# EAGLE board satellite (EAGLE 6.4)
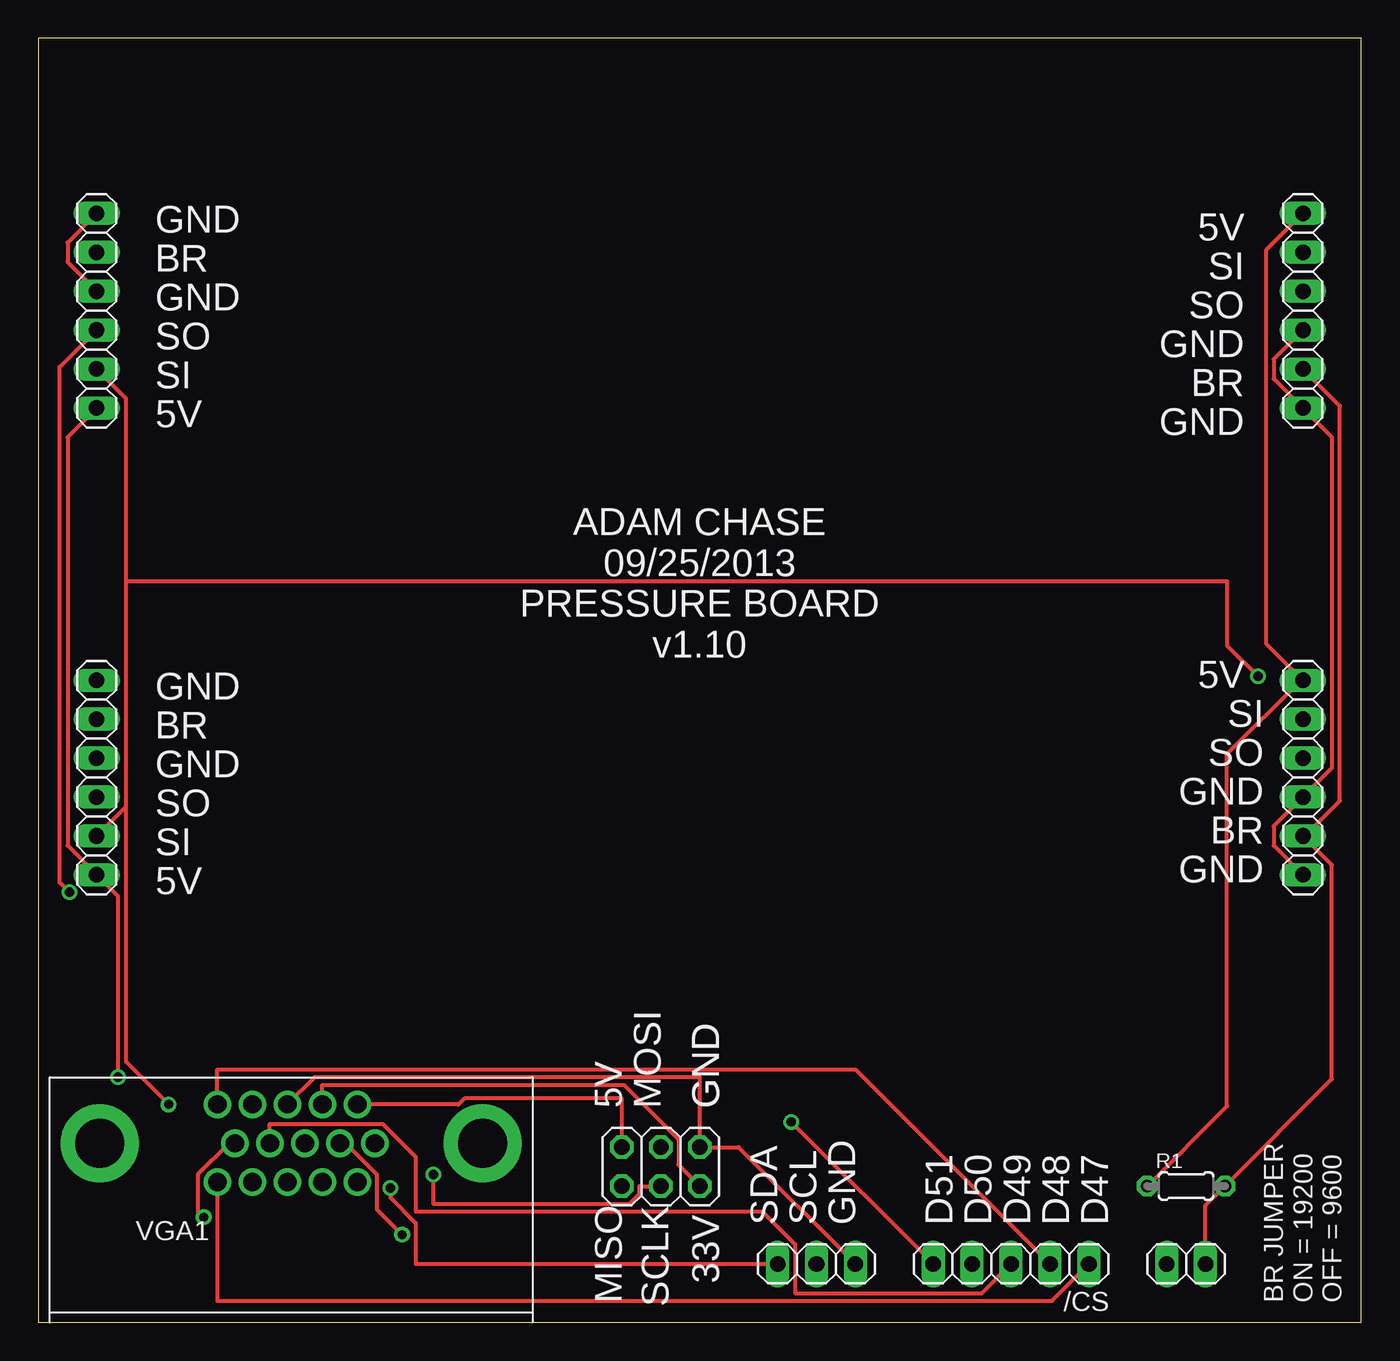
[diagram p0: board, top side]
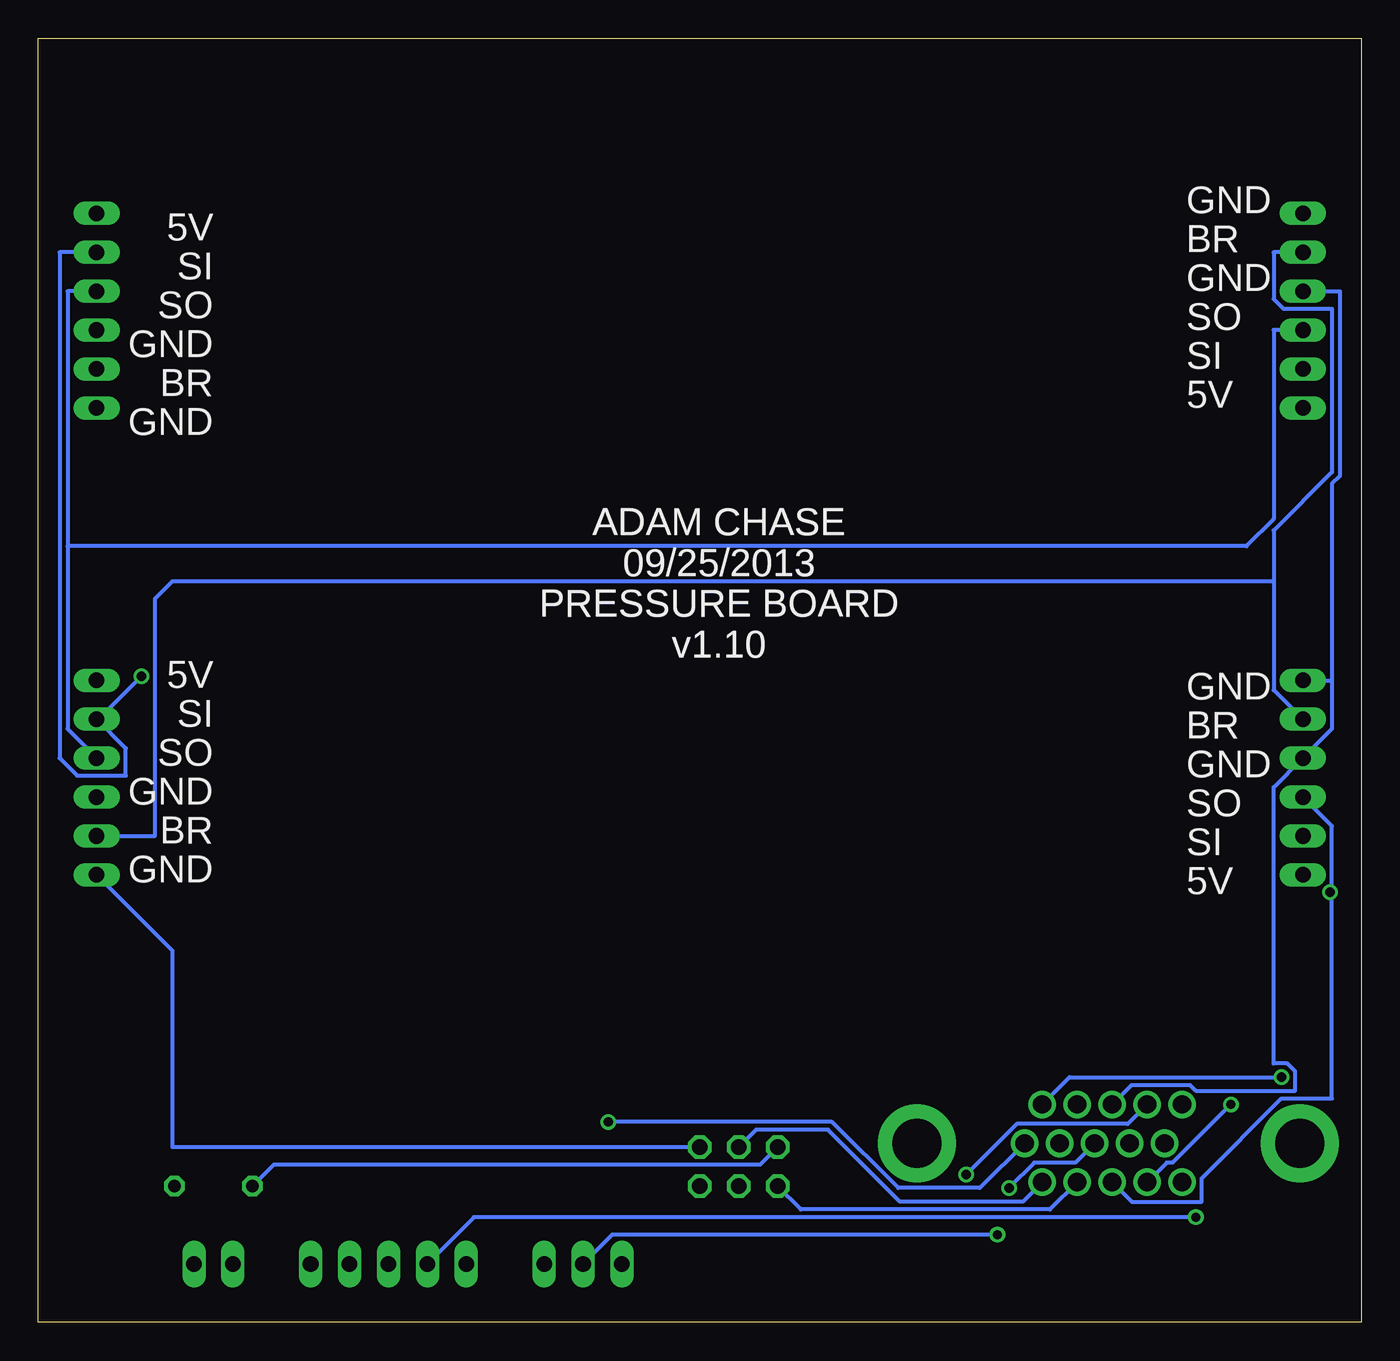
[diagram p1: board, bottom side, seen from below]

Size 86.36 x 83.82 mm. Coordinates in mm from the lower left corner, seen from the top.
Outline: 0,0 86.36,0 86.36,83.82 0,83.82 0,0
Copper layers (1*16): Top 0.035mm / dielectric 1.5mm / Bottom 0.035mm
Design rules "default": minimum track width 10mil, minimum drill 24mil, track to track 8mil, track to pad 8mil, pad to pad 8mil, via to via 8mil, smd to smd 8mil, copper to edge 40mil, drill to drill 8mil, minimum pad ring 10mil, minimum via ring 8mil, stop-mask expansion 4mil, vias tented up to drill 0mil, thermal gap 10mil
tRestrict: area 45.7,50.8 to 77.5,80; area 7.6,19.1 to 39.4,48.3; area 45.7,19.1 to 77.5,48.3; area 7.6,50.8 to 39.4,80
bRestrict: area 7.6,50.8 to 39.4,80; area 45.7,50.8 to 77.5,80; area 7.6,19.1 to 39.4,48.3; area 45.7,19.1 to 77.5,48.3

## Footprints (pad centres in the part's own frame; a part is rotated, then mirrored left to right if it is on the bottom)
1X05 = drill 1.016 long: 1 -5.08,0; 2 -2.54,0; 3 0,0; 4 2.54,0; 5 5.08,0
1X02 = drill 1.016 long: 1 -1.27,0; 2 1.27,0
1X03 = drill 1.016 long: 1 -2.54,0; 2 0,0; 3 2.54,0
1X06 = drill 1.016 long: 1 -6.35,0; 2 -3.81,0; 3 -1.27,0; 4 1.27,0; 5 3.81,0; 6 6.35,0
0204/5 = drill 0.813 octagon: 1 -2.54,0; 2 2.54,0
2X03 = drill 1.016 octagon: 1 -2.54,-1.27; 2 -2.54,1.27; 3 0,-1.27; 4 0,1.27; 5 2.54,-1.27; 6 2.54,1.27
DB-15-F90+SHIELD-SMALL_PADS = drill 1.2 pad 1.524: 1 4.318,14.224; 2 2.032,14.224; 3 -0.254,14.224; 4 -2.54,14.224; 5 -4.826,14.224; 6 5.461,11.684; 7 3.175,11.684; 8 0.889,11.684; 9 -1.397,11.684; 10 -3.683,11.684; 11 4.318,9.144; 12 2.032,9.144; 13 -0.254,9.144; 14 -2.54,9.144; 15 -4.826,9.144 | drill 3.175 pad 5.08: SHIELD@1 -12.497,11.684; SHIELD@2 12.497,11.684

## Placement (x,y rotation side)
/CS  [1X05]  63.5,3.81 180 top
BR  [1X02]  74.93,3.81 180 top
I2C  [1X03]  50.8,3.81 0 top
JP1  [1X06]  3.81,66.04 90 top
JP2  [1X06]  82.55,35.56 270 top
JP3  [1X06]  82.55,66.04 270 top
JP4  [1X06]  3.81,35.56 90 top
R1  4.7K  [0204/5]  74.93,8.89 0 top
SPI  [2X03]  40.64,10.16 0 top
VGA1  VGA-F90S  [DB-15-F90+SHIELD-SMALL_PADS]  16.51,0 0 top

## Library data of the parts
/CS BR I2C JP1-JP4 SPI = pinhead
R1 = rcl
VGA1 = VideoConnectors

## Nets
5V: JP1.1 JP2.1 JP3.1 JP4.1 R1.1 SPI.2 VGA1.1
33V: SPI.5 VGA1.2
BR: BR.1 JP1.5 JP2.5 JP3.5 JP4.5 R1.2
GND: I2C.3 JP1.4 JP1.6 JP2.4 JP2.6 JP3.4 JP3.6 JP4.4 JP4.6 SPI.6 VGA1.3
GPIO1: /CS.1 VGA1.15
GPIO2: /CS.2 VGA1.5
GPIO3: /CS.3 VGA1.9
GPIO4: /CS.4 VGA1.10
GPIO5: /CS.5 VGA1.6
MISO: SPI.1 VGA1.12
MOSI: SPI.4 VGA1.11
RX: JP1.3 JP2.3 JP3.3 JP4.3 VGA1.13
SCL: I2C.2 VGA1.7
SCLK: SPI.3 VGA1.4
SDA: I2C.1 VGA1.8
TX: JP1.2 JP2.2 JP3.2 JP4.2 VGA1.14

## Tracks (layer width: path | path; a pad name or v marks a point on that pad's centre or on a via)
5V  (via drill 0.61)
  Top 0.254: JP3.1 80.14,69.98 80.14,44.32 JP2.1 82.42,41.91 77.6,37.08 77.6,14.1 R1.1 | JP1.1 1.91,57.78 1.91,31.11 JP4.1 5.21,27.81 v5.21,16 | VGA1.1 27.43,14.22 27.81,14.61 38.1,14.61 SPI.2
  Bottom 0.254: R1.1 70.99,10.29 39.24,10.29 SPI.2 | v5.21,16 19.05,16 VGA1.1
33V
  Top 0.254: SPI.5 41.78,10.29 41.78,11.94 38.23,15.49 18.54,15.49 VGA1.2
BR
  Top 0.254: BR.1 76.2,7.62 R1.2 84.45,15.88 84.45,29.84 JP2.5 82.68,31.75 84.96,34.04 84.96,59.82 JP3.5
  Bottom 0.254: JP4.5 5.71,41.27 5.71,48.39 | 5.71,48.39 5.71,51.69 1.91,55.5 1.91,66.17 5.08,66.17 5.71,66.8 5.71,69.85 JP1.5 | 5.71,48.39 77.6,48.39 78.74,47.24 78.74,31.75 JP2.5
GND
  Top 0.254: JP1.4 1.91,69.22 1.91,70.48 JP1.6 | JP2.6 80.64,31.11 80.64,32.38 JP2.4 84.45,36.2 84.45,57.78 JP3.6 80.64,61.59 80.64,62.87 JP3.4 | I2C.3 45.72,11.43 SPI.6 43.18,16 18.03,16 VGA1.3
  Bottom 0.254: 1.91,41.91 1.91,38.73 JP4.4 5.71,34.92 5.71,16.89 4.83,16.89 4.32,16.38 4.32,15.11 10.79,15.11 11.18,15.49 14.99,15.49 VGA1.3 | JP4.6 1.91,41.91 | 1.91,41.91 1.91,54.74 1.4,55.24 1.4,67.31 JP1.4 | JP2.6 77.6,24.26 77.6,11.43 SPI.6
GPIO1
  Top 0.254: /CS.1 66.17,1.4 11.68,1.4 VGA1.15
GPIO2
  Top 0.254: /CS.2 53.34,16.51 11.68,16.51 VGA1.5
GPIO3
  Top 0.254: /CS.3 61.59,1.91 49.4,1.91 49.4,5.08 47.24,7.24 24.64,7.24 24.64,10.79 22.48,12.95 15.11,12.95 VGA1.9
GPIO4  (via drill 0.61)
  Top 0.254: v10.79,6.86 10.41,7.24 10.41,9.65 12.45,11.68 VGA1.10
  Bottom 0.254: /CS.4 57.91,6.86 v10.79,6.86
GPIO5  (via drill 0.61)
  Top 0.254: v49.15,13.08 /CS.5
  Bottom 0.254: v49.15,13.08 34.54,13.08 30.23,8.76 24.89,8.76 VGA1.6
MISO
  Bottom 0.254: SPI.1 36.58,7.37 20.32,7.37 VGA1.12
MOSI
  Bottom 0.254: SPI.4 39.5,12.57 34.8,12.57 30.1,7.87 22.1,7.87 VGA1.11
RX  (via drill 0.61)
  Top 0.254: JP1.3 1.4,62.36 1.4,28.7 v2.03,28.07
  Bottom 0.254: JP2.3 84.45,38.73 84.45,50.67 | 84.45,50.67 84.45,67.31 JP3.3 | JP4.3 1.91,32.38 1.91,28.07 | 1.91,28.07 1.91,14.61 5.21,14.61 10.41,9.4 10.41,7.87 14.99,7.87 VGA1.13 | 1.91,28.07 v2.03,28.07 | 84.45,50.67 7.49,50.67 5.71,52.45 5.71,64.77 JP1.3
SCL  (via drill 0.61)
  Top 0.254: v23.75,5.71 22.1,7.37 22.1,9.65 20.07,11.68 VGA1.7
  Bottom 0.254: I2C.2 48.9,5.71 v23.75,5.71
SCLK  (via drill 0.61)
  Top 0.254: SPI.3 39.24,8.89 39.24,8.38 38.61,7.75 25.78,7.75 v25.78,9.65
  Bottom 0.254: v25.78,9.65 22.48,12.95 15.24,12.95 VGA1.4
SDA  (via drill 0.61)
  Top 0.254: I2C.1 24.64,3.81 24.64,6.48 22.99,8.13 v22.99,8.76
  Bottom 0.254: v22.99,8.76 21.34,10.41 18.67,10.41 VGA1.8
TX  (via drill 0.61)
  Top 0.254: 5.65,33.59 5.71,33.66 5.71,48.39 | 5.65,33.59 JP4.2 | 5.71,48.39 5.71,60.33 JP1.2 | v8.51,14.22 5.71,17.02 5.71,33.53 5.65,33.59 | v79.63,42.16 77.6,44.2 77.6,48.39 5.71,48.39
  Bottom 0.254: JP3.2 84.96,69.85 84.96,36.83 83.82,35.69 80.64,35.69 80.64,37.47 JP2.2 82.42,39.37 v79.63,42.16 | VGA1.14 12.7,10.41 12.32,10.41 v8.51,14.22

## Text on the board
tPlace: 5V | GND | SI | BR | SO | GND | GND | SO | BR | SI | GND | 5V | ADAM CHASE / 09/25/2013 / PRESSURE BOARD / v1.10 | 5V | GND | SI | BR | SO | GND | GND | SO | BR | SI | GND | 5V | 5V | MOSI | GND | GND | SCLK | SDA | SCL | GND | D51 | D50 | D49 | D48 | D47 | 33V | MISO | BR JUMPER / ON = 19200 / OFF = 9600
bPlace: GND | 5V | BR | SI | GND | SO | SO | GND | SI | BR | 5V | GND | ADAM CHASE / 09/25/2013 / PRESSURE BOARD / v1.10 | ADAM CHASE / 09/25/2013 / PRESSURE BOARD / v1.10 | 5V | GND | SI | BR | SO | GND | GND | SO | BR | SI | GND | 5V